# Altium PCB dsPIC Click v1.5.PcbDoc
Units mil, origin at the board's own origin, x right, y up, seen from the top; angles counter-clockwise.
Board outline 1496.06 x 2500 mil, 2 copper layers (Top Layer, Bottom Layer); 78 components, 48 nets, 208 pads, 54 vias.
Unrouted connection lines stored in the file: 1.
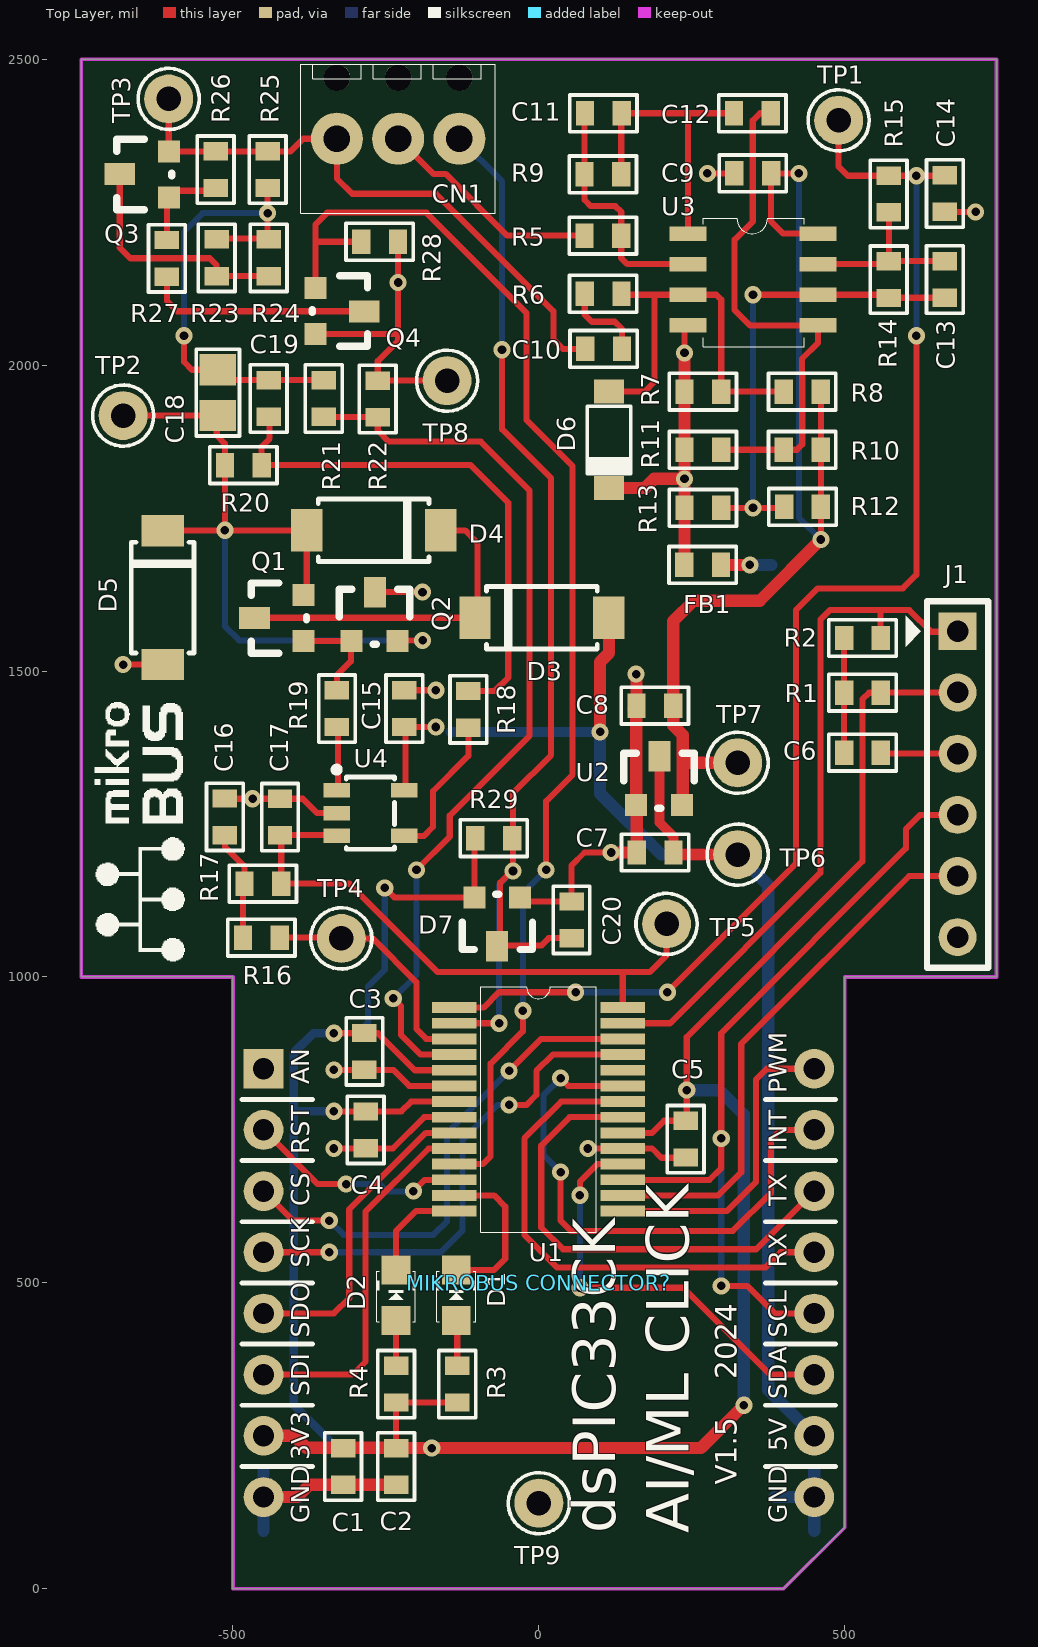
[diagram p0: Top Layer view]
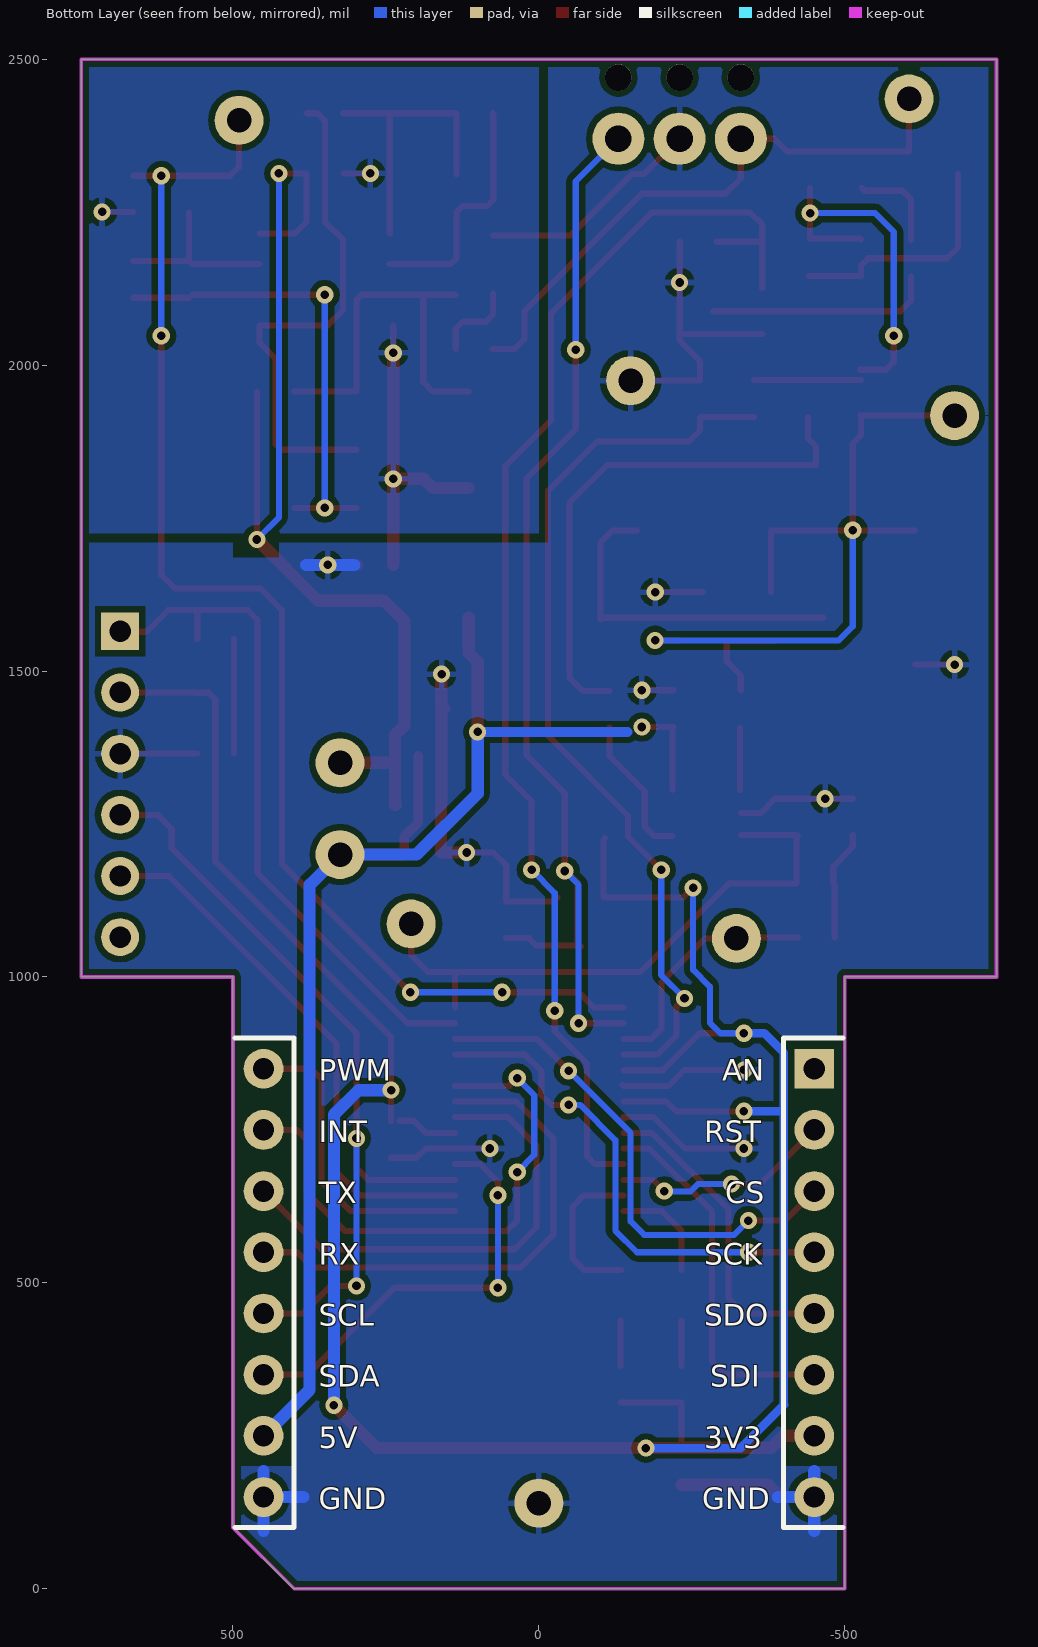
[diagram p1: Bottom Layer view, seen from below]

## Layer stack, top to bottom
Top Solder: solder mask 0.4, Solder Resist, Dk 3.5
Top Layer: signal copper 1.4
Dielectric 1: dielectric 12.6, FR-4, Dk 4.8
Bottom Layer: signal copper 1.4
Bottom Solder: solder mask 0.4, Solder Resist, Dk 3.5

## Board outline
-748.03,1000 -748.03,2500 748.03,2500 748.03,1000 500,1000 500,100 400,0 -500,0 -500,1000

## Design rules (kind name [scope] priority, off if disabled: settings)
Clearance [All] p1: gap=10
PolygonConnect [All] p1: connectstyle=Relief reliefconductorwidth=10 reliefentries=4 polygonreliefangle="90 Angle" airgapwidth=10
RoutingVias [All] p1: holewidth=28 width=50 viastyle="Through Hole" minholewidth=28 minwidth=50 maxholewidth=28 maxwidth=50
SolderMaskExpansion [All] p1: expansion=4
Width [All] p1: maxlimit=100 minlimit=8 preferedwidth=10 minimp=50.000000 maximp=50.000000 favimp=50.000000
30 further rules are at their usual default settings.

## Components (designator, comment, footprint, x,y, rotation, side; value= is the part's Value field where it differs from the comment)
C1 "1uF" 0603C -321.6,230.42 r270 top locked
C2 "0.1uF" 0603C -235,230.42 r270 top locked
C3 "0.1uF" 0603C -283.46,848.02 r90 top locked
C4 "0.1uF" 0603C -284.64,780.42 r270 top locked
C5 "0.1uF" 0603C 241.6,704.58 r90 top locked
C6 "0.1uF" 0603C 498.43,1365 r0 top locked
C7 "0.1uF" 0603C 220.42,1205 r180 top
C8 "1uF" 0603C 220,1445 r180 top
C9 "0.1uF" 0603C 380,2315 r180 top
C10 "0.1uF" 0603C 75.42,2025 r0 top
C11 "47pF" 0603C 75,2410 r0 top
C12 "0.1uF" 0603C 318.5,2410 r0 top
C13 "1000pF" 0603C 665,2109.58 r90 top
C14 "680pF" 0603C 665,2250 r90 top
C15 "1uF" 0603C -218.28,1408.08 r90 top
C16 "0.015uF" 0603C -511.5,1231.33 r90 top
C17 "1500pF" 0603C -421.5,1230.91 r90 top
C18 "22uF" 0805C -524.8,1955 r90 top
C19 "0.1uF" 0603C -440,1915 r90 top
C20 "0.1uF" 0603C 55,1062.99 r90 top
CN1 "1725669" 1725669 -330,2370 r0 top locked
D1 "LED Red" LTST-C171 -135,480 r90 top
D2 "LED Green" LTST-C171 -233.4,480 r90 top
D3 "SS14" SMA-FL 5,1587 r180 top
D4 "SS14" SMA-FL -270,1730 r0 top
D5 "SS14" SMA-FL -615,1620 r90 top
D6 "1N4148W" SOD-123 114.45,1877.95 r90 top
D7 "BAT54S" SOT-23#1 -31.5,1129.92 r180 top
FB1 "FB" 0603FB 298.02,1675 r180 top
J1 "ICSP" HDR1X6 684.41,1565 r270 top locked
"MIKROBUS CONNECTOR?" "MIKROBUS DEVICE CONN." MIKRO_BUS_DSPIC_T 0,0 r0 top locked
Q1 "MMBT3904" SOT-23#2 -385,1550 r90 top
Q2 "MMBT3906" SOT-23#2 -305,1549 r0 top
Q3 "PMV48XP" SOT-23#2 -605,2275 r90 top
Q4 "2N7002" SOT-23#2 -365,2125 r270 top
R1 "10k" 0603R 498.43,1463 r0 top locked
R2 "470R" 0603R 498.43,1552.4 r0 top locked
R3 "330R" 0603R -135,365 r270 top
R4 "330R" 0603R -235,365 r270 top
R5 "10K" 0603R 74.15,2210 r0 top
R6 "49.9R" 0603R 74.58,2115 r0 top
R7 "10K" 0603R 237.6,1955 r0 top
R8 "200K" 0603R 400,1955 r0 top
R9 "100K" 0603R 135,2313.4 r180 top
R10 "100K" 0603R 400,1860 r0 top
R11 "100K" 0603R 237.6,1860 r0 top
R12 "1K" 0603R 400.42,1766.6 r0 top
R13 "1K" 0603R 237.6,1765 r0 top
R14 "4.99K" 0603R 570,2170 r270 top
R15 "10K" 0603R 570,2310 r270 top
R16 "1K" 0603R -423.1,1065.91 r180 top
R17 "10K" 0603R -481.5,1150.91 r0 top
R18 "10K" 0603R -113.65,1407.02 r90 top
R19 "0R" 0603R -328.4,1408.08 r90 top
R20 "100K" 0603R -513.46,1835 r0 top
R21 "100K" 0603R -350,1915 r90 top
R22 "10K" 0603R -265,1975 r270 top
R23 "20R" 0603R -525,2145 r90 top
R24 "20R" 0603R -440,2145 r90 top
R25 "1K" 0603R -445,2350 r270 top
R26 "100K" 0603R -530,2350 r270 top
R27 "100K" 0603R -609.57,2205 r270 top
R28 "10K" 0603R -290.63,2200 r0 top
R29 "10K" 0603R -43.31,1228.35 r180 top
TP1 "Test Point Orange" TP_KEYSTONE_5003 490,2400 r90 top
TP2 "Test Point Orange" TP_KEYSTONE_5003 -679.45,1917.6 r90 top
TP3 "Test Point Orange" TP_KEYSTONE_5003 -605,2435 r90 top
TP4 "Test Point Orange" TP_KEYSTONE_5003 -322.83,1062.99 r90 top
TP5 "Test Point Orange" TP_KEYSTONE_5003 208.66,1086.61 r90 top
TP6 "Test Point Red" TP_KEYSTONE_5000 325,1200 r0 top
TP7 "Test Point Red" TP_KEYSTONE_5000 325,1350 r0 top
TP8 "Test Point Black" TP_KEYSTONE_5001 -150,1974.58 r90 top
TP9 "Test Point Black" TP_KEYSTONE_5001 0,140 r90 top
U1 "dsPIC33CK256MC502" SSOP-28 -0.68,783.62 r270 top locked
U2 "MCP1754ST-3.3v" SOT-23#2 160,1280.91 r0 top
U3 "MCP6487" SOIC-8 243.7,2215 r0 top locked
U4 "MCP6001" TSOP-5 -275.37,1267.92 r270 top locked
? "MikroBusLogo" MB_Large -650,1045 r90 top locked

## Footprints (in the part's own frame and the unit in brackets; to place one, negate y for a bottom-side part, rotate by r counter-clockwise, add the part's x,y. Pads: shape width x height; smd on the part's side, far side on the other; paste and mask are expansions set on the pad)
0603C [mil] "Capacitor"
  rect 30x40 smd: 1(0.42,1.6) 2(60.42,1.6)
  silkscreen extent -25,-28 85,32, body extent -2,-15 61,17, height 31
0603FB [mil] "Ferrite Bead"
  rect 30x40 smd: 1(0.42,1.6) 2(60.42,1.6)
  silkscreen extent -25,-28 85,32, body extent -2,-16 61,16, height 31
0603R [mil] "Resistor"
  rect 30x40 smd: 1(0.42,1.6) 2(60.42,1.6)
  silkscreen extent -25,-28 85,32, body extent -2,-16 61,16, height 18
0805C [mm] "Capacitor"
  rect 1.3x1.5 smd: 1(-0.95,0) 2(0.95,0)
  silkscreen extent -1.8,-0.9 1.8,0.9, body extent -1,-0.62 1,0.63, height 1.25
1725669 [mm] "Connector; Terminal; 3 Position, 2.45mm"
  round 2.159 hole 1.1: 1(0,0) 2(2.54,0) 3(5.08,0)
  round 1.1 hole 1.1 unplated mask+0.051: ""(0,2.54) ""(2.54,2.54) ""(5.08,2.54)
  silkscreen extent -1.5,-3.1 6.58,3.1, body extent -1.52,-3.13 6.62,3.08, height 8.5
HDR1X6 [mil]
  rect 62x62 hole 35: 1(0,0)
  round 62 hole 35: 2(100,0) 3(200,0) 4(300,0) 5(400,0) 6(500,0)
  silkscreen extent -49,-85 550,50, body extent -50,-50 550,50, height 336
LTST-C171 [mm] "led, 0805"
  rect 1.2x1.2 smd: 1(-1.05,0) 2(1.05,0)
  silkscreen extent -1.1,-0.8 1,0.8, body extent -1,-0.63 1,0.62, height 1.1
MB_Large [mil]
  silkscreen extent -20,-71 404,76
MIKRO_BUS_DSPIC_T [mil] "Mikro Bus Click - T-Shaped"
  rect 65x65 hole 35: 1(-450,850)
  round 65 hole 35: 2(-450,750) 3(-450,650) 4(-450,550) 5(-450,450) 6(-450,350) 7(-450,250) 8(-450,150) 9(450,150) 10(450,250) 11(450,350) 12(450,450) 13(450,550) 14(450,650) 15(450,750) 16(450,850)
  silkscreen extent -485,200 485,800, body extent -500,100 500,900, height 98
SMA-FL [mm]
  rect 1.3x1.76 smd: 1(-2.78,0) 2(2.78,0)
  silkscreen extent -2.3,-1.3 2.3,1.3, body extent -2.5,-1.35 2.5,1.35, height 2.22
SOD-123 [mm]
  rect 1x1.25 smd: 1(2,0) 2(-2,0)
  silkscreen extent -1.4,-0.9 1.4,0.9, body extent -1.9,-0.8 1.9,0.8, height 1.25
SOIC-8 [mm]
  rect 1.55x0.6 smd: 1(0,0) 2(0,-1.27) 3(0,-2.54) 4(0,-3.81) 5(5.4,-3.81) 6(5.4,-2.54) 7(5.4,-1.27) 8(5.4,0)
  silkscreen extent 0.64,-4.7 4.83,0.64, body extent -0.5,-4.45 5.5,0.45, height 1.75
SOT-23#1 [mil]
  rect 36x36 smd: 1(-1,0) 2(74,0)
  rect 36x50 smd: 3(37,80)
  silkscreen extent -21,-5 94,85, body extent -23,-8 95,91, height 47
SOT-23#2 [mil]
  rect 36x36 smd: 1(-1,-0.17) 2(74,-0.17)
  rect 36x50 smd: 3(37,79.83)
  silkscreen extent -21,-5 94,85, body extent -23,-7 95,92, height 47
SSOP-28 [mm]
  rect 0.45x1.85 smd mask+0.08: 1(-4.225,-3.5) 2(-3.575,-3.5) 3(-2.925,-3.5) 4(-2.275,-3.5) 5(-1.625,-3.5) 6(-0.975,-3.5) 7(-0.325,-3.5) 8(0.325,-3.5) 9(0.975,-3.5) 10(1.625,-3.5) 11(2.275,-3.5) 12(2.925,-3.5) 13(3.575,-3.5) 14(4.225,-3.5) 15(4.225,3.5) 16(3.575,3.5) 17(2.925,3.5) 18(2.275,3.5) 19(1.625,3.5) 20(0.975,3.5) 21(0.325,3.5) 22(-0.325,3.5) 23(-0.975,3.5) 24(-1.625,3.5) 25(-2.275,3.5) 26(-2.925,3.5) 27(-3.575,3.5) 28(-4.225,3.5)
  silkscreen extent -5.1,-2.4 5.1,2.4, body extent -5.1,-3.9 5.1,3.9, height 2.1
TP_KEYSTONE_5000 [mil] "Red"
  round 80 hole 40: 1(0,0)
  silkscreen extent -50,-50 50,50, body extent -50,-50 50,50, height 180
TP_KEYSTONE_5001 [mil] "Black"
  round 80 hole 40: 1(0,0)
  silkscreen extent -50,-50 50,50, body extent -50,-50 50,50, height 180
TP_KEYSTONE_5003 [mil]
  round 80 hole 40: 1(0,0)
  silkscreen extent -50,-50 50,50, body extent -50,-50 50,50, height 180
TSOP-5 [mm] "Small Outline; 6 Leads (1 Absent); Body Width 4.4 mm; Pitch 1.27 mm"
  rect 0.6x1.1 smd: 1(-0.95,-1.4) 2(0,-1.4) 3(0.95,-1.4) 4(0.95,1.4) 5(-0.95,1.4)
  silkscreen extent -1.92,-1.52 1.5,1, body extent -1.45,-1.4 1.45,1.4, height 0.95

## Part data
C1 C2 C3 C4 C5 C6: "Capacitor"
C7 C8 C9 C10 C11 C12 C13 C14 C15 C16 C17 C18 C19 C20: library part CAP, "Capacitor"
CN1: "Terminal Block, 3-Position"
D1: "Red LED"
D2: "Green LED"
D3 D4 D5: "Diode, Schottky"
D6: "1N4148W, SOD-123"
D7: "Schottky Diode, Dual, Common Cathode"
FB1: "Ferrite Bead"
J1: library part "Header 6", "Header, 6-Pin"
"MIKROBUS CONNECTOR?": "mikroBUS Target Header"
Q1: "Transistor, NPN"
Q2: "Transistor, PNP"
Q3: "MOSFET, P-Channel"
Q4: "MOSFET"
R1 R2 R3 R4 R5 R6 R7 R8 R9 R10 R11 R12 R13 R14 R15 R16 R17 R18 R19 R20 R21 R22 R23 R24 R25 R26 R27 R28 R29: library part Res1, "Resistor"
TP1 TP2 TP3 TP4 TP5: "Test Point, 5003"
TP6 TP7: "Test Point, 5000"
TP8 TP9: "Test Point, 5001"
U1: "16-bit MCU"
U2: "LDO"
U3: "OPAMP, Dual"
U4: "OPAMP, Single"
?: "Logo"

## Via types
v1: diameter 28, hole 14, Top Layer to Bottom Layer, 54 vias

## Nets (pads, with @x,y where several pads share a name; then routed paths per layer and width w, separated by ;. In a path a pad name is that pad's centre, name@x,y a point inside that pad or via, vN(x,y) a via of type N, cw(c..) or ccw(c..) an arc to the next point about the centre after c; other vN are vias at no path point)
+3.3: "MIKROBUS CONNECTOR?.7" C1.1 C2.1 C3.2 C4.1 C5.2 D7.2 J1.2 R1.2 R3.2 R4.2 R29.2 U1.5 U1.7 U1.20 | length 4598.2
  Top Layer w10: v1(-335,780.42) -224.58,780.42 -208.58,796.42 U1.7 ; v1(-335,908.02) -263.02,908.02 -202.6,847.6 U1.5 ; C1.1@-321.6,230.42 C1.1@-318.23,233.8 ; v1(-251.97,1145.67) -236.22,1129.92 D7.2 -105.5,1224.57 R29.2@-107.67,1226.75 ; C2.1 R4.2 R3.2 ; U1.20 185.03,745.24 204.8,765 C5.2@227.72,765 ; C5.2@241.6,764.58 v1(241.6,815) 241.6,901.6 528.85,1188.85 528.85,1453.85 539.6,1464.6 R1.2 ; R1.2@559.25,1465 J1.2
  Top Layer w20: -450,250 -399.58,250 -380,230.42 -321.6,230.42 -233.83,230.42 C2.1 v1(-175,230) 265,230 v1(335,300)
  Bottom Layer w10: v1(-335,908.02) -296.7,908.02 -279.53,925.2 -279.53,984.25 -251.97,1011.81 v1(-251.97,1145.67)
  Bottom Layer w14: -400.5,780.42 v1(-335,780.42) ; v1(-335,908.02) -368.58,908.02 -400.5,876.1 -400.5,301.72 -401.11,301.11 -330,230 v1(-175,230)
  Bottom Layer w20: v1(241.6,815) 295,815 335,775 v1(335,300)
+3.3A: C8.1 C9.1 R8.2 R10.2 R12.2 TP7.1 U2.2 U3.8 | length 1758
  Top Layer w10: v1(425,2313.4) C9.1 379.58,2234.68 399.25,2215 U3.8 ; v1(460.85,1715) R12.2 R8.2@460.85,1956.17
  Top Layer w20: U2.2@234,1280.91 235,1280.91 235,1350 ; TP7.1 235,1350 ; v1(460.85,1715) 360.85,1615 253.02,1615 219.58,1581.55 C8.1 219.58,1410.85 235,1395.42 235,1350
  Bottom Layer w10: v1(425,2313.4) 425,1750.85 v1(460.85,1715)
+5: "MIKROBUS CONNECTOR?.10" C7.1 C15.1 D3.1 TP6.1 U2.3 U4.5 | length 2230
  Top Layer w10: U4.5@-218.28,1305.48 -218.28,1406.9 C15.1 v1(-168.4,1408.5)
  Top Layer w16: U2.3@197,1360.91 197,1252.58 220,1229.58 C7.1
  Top Layer w20: v1(100,1400.42) 100,1514.85 114.45,1529.3 D3.1 ; C7.1@223.4,1200 TP6.1
  Bottom Layer w16: -145,1400.42 v1(100,1400.42)
  Bottom Layer w20: v1(100,1400.42) 100,1300 200,1200 TP6.1 374.47,1150.53 374.47,1150 375,1149.47 375,325 450,250
AGND: C9.2 C14.1 D6.2 FB1.2 R7.1 R11.1 R13.1 U3.4 | length 615.4
  Top Layer w10: v1(238.02,2020) U3.4@238.02,2065 ; v1(275.42,2313.4) C9.2 ; C14.1 v1(713.73,2250.42)
  Top Layer w20: D6.2 173.23,1799.21 188.11,1814.1 v1(238.02,1814.1) ; FB1.2@238.02,1673.83 R13.1 v1(238.02,1814.1) ; v1(238.02,2020) R7.1 R11.1 v1(238.02,1814.1)
BAT_DETECT: R21.1 R22.2 U1.4 | length 1486.5
  Top Layer w10: R21.1 -264.25,1915.42 R22.2 -263.4,1893.4 -245,1875 -95,1875 -15,1795 -15,1394.45 -145.67,1263.78 -145.67,1229.33 v1(-200,1175) ; v1(-238.02,965) -225.2,952.18 -225.2,905 -193.39,873.19 U1.4
  Bottom Layer w10: v1(-238.02,965) -200,1003.02 v1(-200,1175)
BAT_SNS_ADC: C14.2 R15.1 TP1.1 U1.1 | length 2198
  Top Layer w10: U1.1 -90.24,949.96 -65.2,975 v1(60,975) ; v1(210,975) 420,1185 420,1599.58 455.42,1635 595,1635 617.08,1657.08 v1(617.08,2047.92) ; TP1.1 490,2324.58 505,2309.58 R15.1 v1(617.08,2309.58) C14.2@662.55,2309.58
  Bottom Layer w10: v1(60,975) v1(210,975) ; v1(617.08,2047.92) v1(617.08,2309.58)
BAT_TH: C20.1 CN1.3 D7.3 R29.1 U1.2 | length 1875.3
  Top Layer w10: U1.2 v1(-65,924.37) ; D7.3 D7.3@-63.5,1054.92 ; v1(-60.2,2025) -60.2,1895.2 20,1815 20,1362.52 -42.31,1300.21 v1(-42.31,1173.23) -44.4,1173.23 -63.5,1154.13 D7.3@-63.5,1054.92 ; C20.1 16.17,1063.42 3.94,1051.18 -59.76,1051.18 D7.3@-63.5,1054.92
  Bottom Layer w10: CN1.3 -60.2,2300.2 v1(-60.2,2025) ; v1(-65,924.37) -65,1150.54 v1(-42.31,1173.23)
DAC_SINE: R16.1 TP4.1 U1.3 | length 398.4
  Top Layer w10: R16.1 -324.15,1064.31 TP4.1 -271.65,1062.99 -200.2,991.54 -200.2,915 -183.98,898.78 U1.3
IRQ: "MIKROBUS CONNECTOR?.15" U1.23 | length 903.6
  Top Layer w10: v1(35.43,681.1) 35.43,601.73 52.17,585 317.13,585 379.58,647.45 379.58,734.15 395.42,750 450,750 ; v1(35.43,834.65) 48.07,822.01 U1.23
  Bottom Layer w10: v1(35.43,681.1) 7.45,709.08 7.45,806.67 v1(35.43,834.65)
LED_GRN: D2.2 U1.14 | length 172
  Top Layer w10: D2.2 -233.4,585 -201.12,617.28 U1.14
LED_RED: D1.2 U1.13 | length 263.8
  Top Layer w10: U1.13 -73.08,642.87 -55,624.8 -55,539.49 -73.15,521.34 D1.2
MCLR: J1.1 R2.2 U1.27 | length 1131.7
  Top Layer w10: U1.27 214.37,924.37 460,1170 460,1583.9 475.75,1599.65 558.43,1599.65 ; R2.2@558.43,1552.4 558.43,1599.65 ; J1.1 683.62,1564.21 641.1,1564.21 605.67,1599.65 558.43,1599.65
NetC6_1: C6.1 R1.1 R2.1 | length 187.4
  Top Layer w10: C6.1@498.43,1365 498.43,1456.93 R2.1@498.43,1552.4
NetC10_2: C10.2 R6.1 | length 137.1
  Top Layer w10: R6.1 75,2082.48 86.61,2070.87 124.04,2070.87 135.85,2059.06 C10.2
NetC11_1: C11.1 R5.2 R9.2 U3.2 | length 398.8
  Top Layer w10: C11.1 74.58,2410.75 R9.2 74.58,2270 84.58,2260 125,2260 134.58,2250.42 R5.2 134.58,2175 144.58,2165 U3.2
NetC11_2: C11.2 C12.1 R9.1 U3.1 | length 481.3
  Top Layer w10: R9.1 134.58,2410.75 C11.2 C12.1@320,2411.6 ; U3.1 243.7,2411.6
NetC12_2: C12.2 R10.1 R11.2 U3.5 | length 845
  Top Layer w10: R11.2 R10.1 421.6,1861.6 430.42,1870.42 430.42,1982.81 430,1983.24 430,2010 456.3,2036.3 U3.5 345,2065 320,2090 320,2205 349.58,2234.58 349.58,2399.58 361.6,2411.6 C12.2 C12.2@379.42,2411.6
NetC13_1: C13.1 R12.1 R13.2 R14.2 U3.6 | length 757.2
  Top Layer w10: R13.2 v1(350,1766.6) R12.1@399.25,1766.6 ; v1(350,2115) U3.6 R14.2@566.17,2115 ; R14.2@572.02,2110 C13.1
  Bottom Layer w10: v1(350,1766.6) v1(350,2115)
NetC13_2: C13.2 R14.1 R15.2 U3.7 | length 281.9
  Top Layer w10: U3.7 R14.1@567.02,2165 ; R15.2 572.02,2249.15 572.02,2170 C13.2
NetC16_1: C16.1 R16.2 R17.1 | length 181.7
  Top Layer w10: C16.1 -513.1,1212.5 -481.07,1180.48 R17.1 -483.52,1150.06 R16.2
NetC18_1: C18.1 D4.1 D5.2 Q1.2 Q2.2 R20.1 TP2.1 | length 1211.4
  Top Layer w10: TP2.1 C18.1 ; D5.2 -614.45,1730 v1(-513.04,1730) ; C18.1@-526.4,1915.42 -526.4,1885 -513.04,1871.64 R20.1 v1(-513.04,1730) ; Q1.2@-379.45,1629.55 D4.1 v1(-513.04,1730) ; Q2.2@-230,1550 v1(-190,1550)
  Bottom Layer w10: v1(-513.04,1730) -513.04,1573.04 -490,1550 v1(-190,1550)
NetC18_2: C18.2 C19.2 R21.2 R23.2 R24.2 R25.2 | length 763.5
  Top Layer w10: v1(-580,2047.92) -580,2005.2 -567.2,1992.4 C18.2 ; R23.2 -524.8,2207.23 -443.4,2207.23 v1(-443.4,2248.4) R25.2 ; C18.2@-526.4,1975.42 R21.2
  Bottom Layer w10: v1(-580,2047.92) -580,2217.83 -549.43,2248.4 v1(-443.4,2248.4)
NetC19_1: C19.1 R18.2 R20.2 | length 872.3
  Top Layer w10: C19.1@-440,1915 -440,1880 -453.04,1866.96 R20.2 -111.6,1836.6 -50,1775 -50,1489.37 -71.92,1467.45 R18.2
NetD1_1: D1.1 R3.1 | length 74.1
  Top Layer w10: R3.1 D1.1@-133.4,438.66
NetD2_1: D2.1 R4.1 | length 74.1
  Top Layer w10: R4.1 D2.1
NetD3_2: D3.2 D4.2 Q1.3 | length 558.2
  Top Layer w10: Q1.3@-465,1587 D3.2@-100.6,1587 ; D4.2 -120.55,1730 -100.6,1710.05 D3.2@-100.6,1587 ; D3.2@-100.6,1584.45 D3.2@-100.6,1587
NetD6_1: D6.1 R6.2 R7.2 R8.1 U3.3 | length 641.1
  Top Layer w10: D6.1 173.23,1956.69 188.98,1972.44 188.98,2115 ; R6.2@136.6,2115 188.98,2115 ; R8.1 R7.2 298.02,2106.98 290,2115 U3.3 188.98,2115
NetQ1_1: Q1.1 Q2.1 R19.2 | length 169.3
  Top Layer w10: Q1.1@-385,1549 Q1.1 Q2.1@-306,1549 ; R19.2 -330,1492.83 -307.09,1515.75 -307.09,1547.74 Q2.1
NetQ3_1: Q3.1 R26.2 R27.1 | length 153.7
  Top Layer w10: R27.1 -607.97,2271.03 -605,2274 -594,2285 -532.98,2285 R26.2
NetQ3_3: Q3.3 R23.1 R24.1 | length 393.1
  Top Layer w10: Q3.3@-685,2312 -685,2191.93 -667.65,2174.58 -537.98,2174.58 -526.6,2163.2 R23.1 R24.1
NetQ4_3: Q4.3 R27.2 | length 369.6
  Top Layer w10: R27.2 -607.97,2105 -590.97,2088 Q4.3@-285,2088
NetR18_1: R18.1 U4.4 | length 237.5
  Top Layer w10: U4.4@-218.28,1230.68 -187.53,1230.68 -173.01,1245.2 -173.01,1303.45 -115.24,1361.21 R18.1
NetR19_1: R19.1 U4.1 | length 101.5
  Top Layer w10: U4.1@-328.52,1305.48 R19.1@-328.52,1407.02
PGC: J1.5 U1.16 | length 886.6
  Top Layer w10: U1.16 292.87,642.87 330.71,680.71 330.71,890.71 605,1165 J1.5
PGD_SCL: "MIKROBUS CONNECTOR?.12" J1.4 U1.17 | length 1353.9
  Top Layer w10: U1.17 278.89,668.46 298.02,687.6 v1(298.02,736.22) 298.02,908.02 600,1210 600,1241.73 623.27,1265 J1.4 ; v1(298.02,495) 340.32,495 385.32,450 450,450
  Bottom Layer w10: v1(298.02,495) v1(298.02,736.22)
PWM: "MIKROBUS CONNECTOR?.16" U1.15 | length 507.5
  Top Layer w10: U1.15 307.28,617.28 355,665 355,832.6 372.4,850 450,850
RST: "MIKROBUS CONNECTOR?.2" U1.12 | length 360.9
  Top Layer w10: -450,750 -361.42,661.42 v1(-314.96,661.42) ; v1(-205,650) -186.54,668.46 U1.12
  Bottom Layer w10: v1(-314.96,661.42) -259.84,661.42 -248.03,649.61 -205.39,649.61 v1(-205,650)
RXD: "MIKROBUS CONNECTOR?.13" U1.22 | length 849.4
  Top Layer w10: U1.22 36.57,796.42 -23.62,736.22 -23.62,578.74 30.12,525 370,525 395,550 450,550
SDA: "MIKROBUS CONNECTOR?.11" U1.18 | length 697.2
  Top Layer w10: v1(66.93,492.13) 236.22,492.13 378.35,350 450,350 ; v1(66.93,643.3) 66.93,665.35 95.63,694.06 U1.18
  Bottom Layer w10: v1(66.93,492.13) v1(66.93,643.3)
SINE_ADC: C17.1 R17.2 TP5.1 U1.28 U4.3 | length 982.1
  Top Layer w10: C17.1 C17.1@-421.34,1229.58 ; U4.3@-330.49,1232.28 -418.63,1232.28 C17.1@-421.34,1229.58 ; U1.28 137.12,1007.2 137.8,1007.87 ; TP5.1 208.66,1035.43 181.1,1007.87 137.8,1007.87 ; C17.1@-421.34,1229.58 -421.07,1229.31 R17.2 -309.98,1152.5 -165.35,1007.87 137.8,1007.87
SNS+: C10.1 CN1.1 Q3.2 R25.1 R26.1 TP3.1 | length 982.6
  Top Layer w10: TP3.1 -605,2349 -406,2349 -385,2370 CN1.1 -330,2305 -305,2280 -168.4,2280 23.62,2087.98 23.62,2042.35 39.37,2026.6 C10.1
SNS-: "MIKROBUS CONNECTOR?.8" "MIKROBUS CONNECTOR?.9" C1.2 C2.2 C3.1 C4.2 C5.1 C6.2 C7.2 C8.2 C15.2 C16.2 C17.2 C20.2 CN1.2 D5.1 D7.1 FB1.1 J1.3 Q2.3 Q4.2 R5.1 R22.1 R28.2 TP8.1 TP9.1 U1.6 U1.8 U1.19 U2.1 U4.2 | length 3198.4
  Top Layer w10: v1(-679.45,1510.55) D5.1 ; C16.2 -512.67,1291.33 C17.2 -385.82,1291.33 -362.41,1267.92 U4.2 ; Q4.2@-365,2051 -230,2051 ; v1(-335,719.65) -238.64,719.65 -187.46,770.83 U1.8 U1.8@-140.2,769.09 ; v1(-335,848.02) -238.02,848.02 -212.01,822.01 U1.6 U1.6@-136.74,823.74 ; Q2.3@-268,1629 v1(-190.2,1629) ; R28.2 -230.2,2039.8 -263.4,2006.6 R22.1 TP8.1 ; CN1.2 -172.5,2312.5 -152.5,2312.5 -51.6,2211.6 R5.1 ; C15.2 v1(-168.4,1468.5) ; D7.1 -23.99,1123.42 C20.2 53.4,1182.23 74.58,1203.4 v1(118.11,1203.4) ; v1(80,719.65) U1.19 185.15,719.65 200.22,704.58 C5.1@241.6,704.58 ; C6.2@558.43,1365 J1.3
  Top Layer w20: -450,150 -395,150 -375,170 C2.2 ; v1(118.11,1203.4) C7.2 160,1279.91 159,1280.91 C8.2@159,1442.83 ; C8.2@154.48,1438.31 C8.2@159,1442.83 ; v1@159.58,1494.42 C8.2 C8.2@159,1442.83 ; FB1.1 v1(345,1673.4)
  Bottom Layer w20: -450,95 -450,150 ; -450,192.21 -450,150 ; -390,150 -450,150 ; 301.45,1673.4 v1(345,1673.4) 380,1673.4 ; 385,150 450,150 ; 450,95 450,150 ; 450,192.21 450,150
  other v1: -467.88,1291.33 159,1495 -230,2135
SPI_CS: "MIKROBUS CONNECTOR?.3" U1.26 | length 834
  Top Layer w10: -450,650 -401.73,601.73 v1(-342.52,601.73) ; v1(-48.58,846.46) 3.75,898.78 U1.26
  Bottom Layer w10: v1(-342.52,601.73) -319.2,578.42 -172.33,578.42 -150,600.74 -150,745.03 v1(-48.58,846.46)
SPI_SCK: "MIKROBUS CONNECTOR?.4" U1.25 | length 830.7
  Top Layer w10: -450,550 v1(-342.52,550) ; v1(-48.58,791) -20.02,791 -3.94,807.09 -3.94,846.46 22.8,873.19 U1.25
  Bottom Layer w10: v1(-342.52,550) -160.4,550 -125,585.4 -125,733.27 -67.27,791 v1(-48.58,791)
SPI_SDI: "MIKROBUS CONNECTOR?.6" U1.10 | length 608.4
  Top Layer w10: -450,350 -304.58,350 -283.04,371.54 -283.04,616.96 -180.35,719.65 U1.10
SPI_SDO: "MIKROBUS CONNECTOR?.5" U1.9 | length 518.8
  Top Layer w10: -450,450 -335,450 -310,475 -310,620 -184.76,745.24 U1.9
TEST_EN: Q4.1 R28.1 U1.11 | length 2129.3
  Top Layer w10: Q4.1@-365,2126 -365,2230 -345.85,2249.15 -184.15,2249.15 -20,2085 -20,1910 55,1835 55,1330.59 11.81,1287.4 v1(11.81,1175) ; -365,2201.6 R28.1 ; U1.11 -91.69,694.06 -78.74,707.01 -78.74,858.27 -26,911.01 v1(-26,944.88)
  Bottom Layer w10: v1(-26,944.88) -26,1137.19 v1(11.81,1175)
TXD: "MIKROBUS CONNECTOR?.14" U1.21 | length 786.4
  Top Layer w10: U1.21 50.35,770.83 3.94,724.41 3.94,590.55 39.49,555 355,555 450,650
pads on no net: "MIKROBUS CONNECTOR?.1" CN1. J1.6 U1.24

## Polygon pours and split planes (outlines as drawn)
AGND on Bottom Layer "TopLayer-No Net" (solid, pour order 2): 0,1725 750,1725 750,2500 0,2500
SNS- on Bottom Layer "SNS-_L02_P000" (solid, remove dead copper, pour order 0): -750,2500 -15,2500 -15,1710 424.6,1710 424.6,1685 500,1685 500,1710 750,1710 750,1000 500,1000 500,900 400,900 400,200 490,200 490,105 395,10 375,10 -490,10 -490,200 -395,200 -395,900 -500,900 -500,1000 -750,1000

## Keep-outs
Keep-Out Layer:
  the board outline again, w6

## Silkscreen, mask and mechanical layers (free items; w line width, h text height)
Top Overlay:
  text "V1.5    2024" at 335,170 h60 r90

## Text inside footprints (layer, text, board x,y; h text height)
"MIKROBUS CONNECTOR?": Top Overlay "dsPIC33CK / AI/ML CLICK" at 267.72,90.55 h120 r90; Top Overlay "PWM" at 405,810 h30 r90; Top Overlay "CS" at -375,625 h30 r90; Top Overlay "TX" at 405,625 h30 r90; Top Overlay "RX" at 405,525 h30 r90; Top Overlay "SCL" at 405,410 h30 r90; Top Overlay "SDA" at 405,310 h30 r90; Top Overlay "GND" at 405,107 h30 r90; Top Overlay "SDO" at -375,410 h30 r90; Top Overlay "RST" at -375,710 h30 r90; Top Overlay "INT" at 405,715 h30 r90; Top Overlay "SCK" at -375,525 h30 r90; Top Overlay "AN" at -375,825 h30 r90; Top Overlay "SDI" at -375,315 h30 r90; Top Overlay "5V" at 405,225 h30 r90; Top Overlay "3V3" at -375,210 h30 r90; Top Overlay "GND" at -375,107 h30 r90; Bottom Overlay "SCK" at -270,530 h35; Bottom Overlay "AN" at -300,830 h35; Bottom Overlay "TX" at 360,630 h35; Bottom Overlay "RX" at 360,530 h35; Bottom Overlay "5V" at 360,230 h35; Bottom Overlay "GND" at 360,130 h35; Bottom Overlay "PWM" at 360,830 h35; Bottom Overlay "RST" at -270,730 h35; Bottom Overlay "SDA" at 360,330 h35; Bottom Overlay "SDO" at -270,430 h35; Bottom Overlay "3V3" at -270,230 h35; Bottom Overlay "GND" at -267,130 h35; Bottom Overlay "CS" at -305,630 h35; Bottom Overlay "SDI" at -280,330 h35; Bottom Overlay "INT" at 360,730 h35; Bottom Overlay "SCL" at 360,430 h35